# EAGLE board PCB Layout (EAGLE 9.7.0)
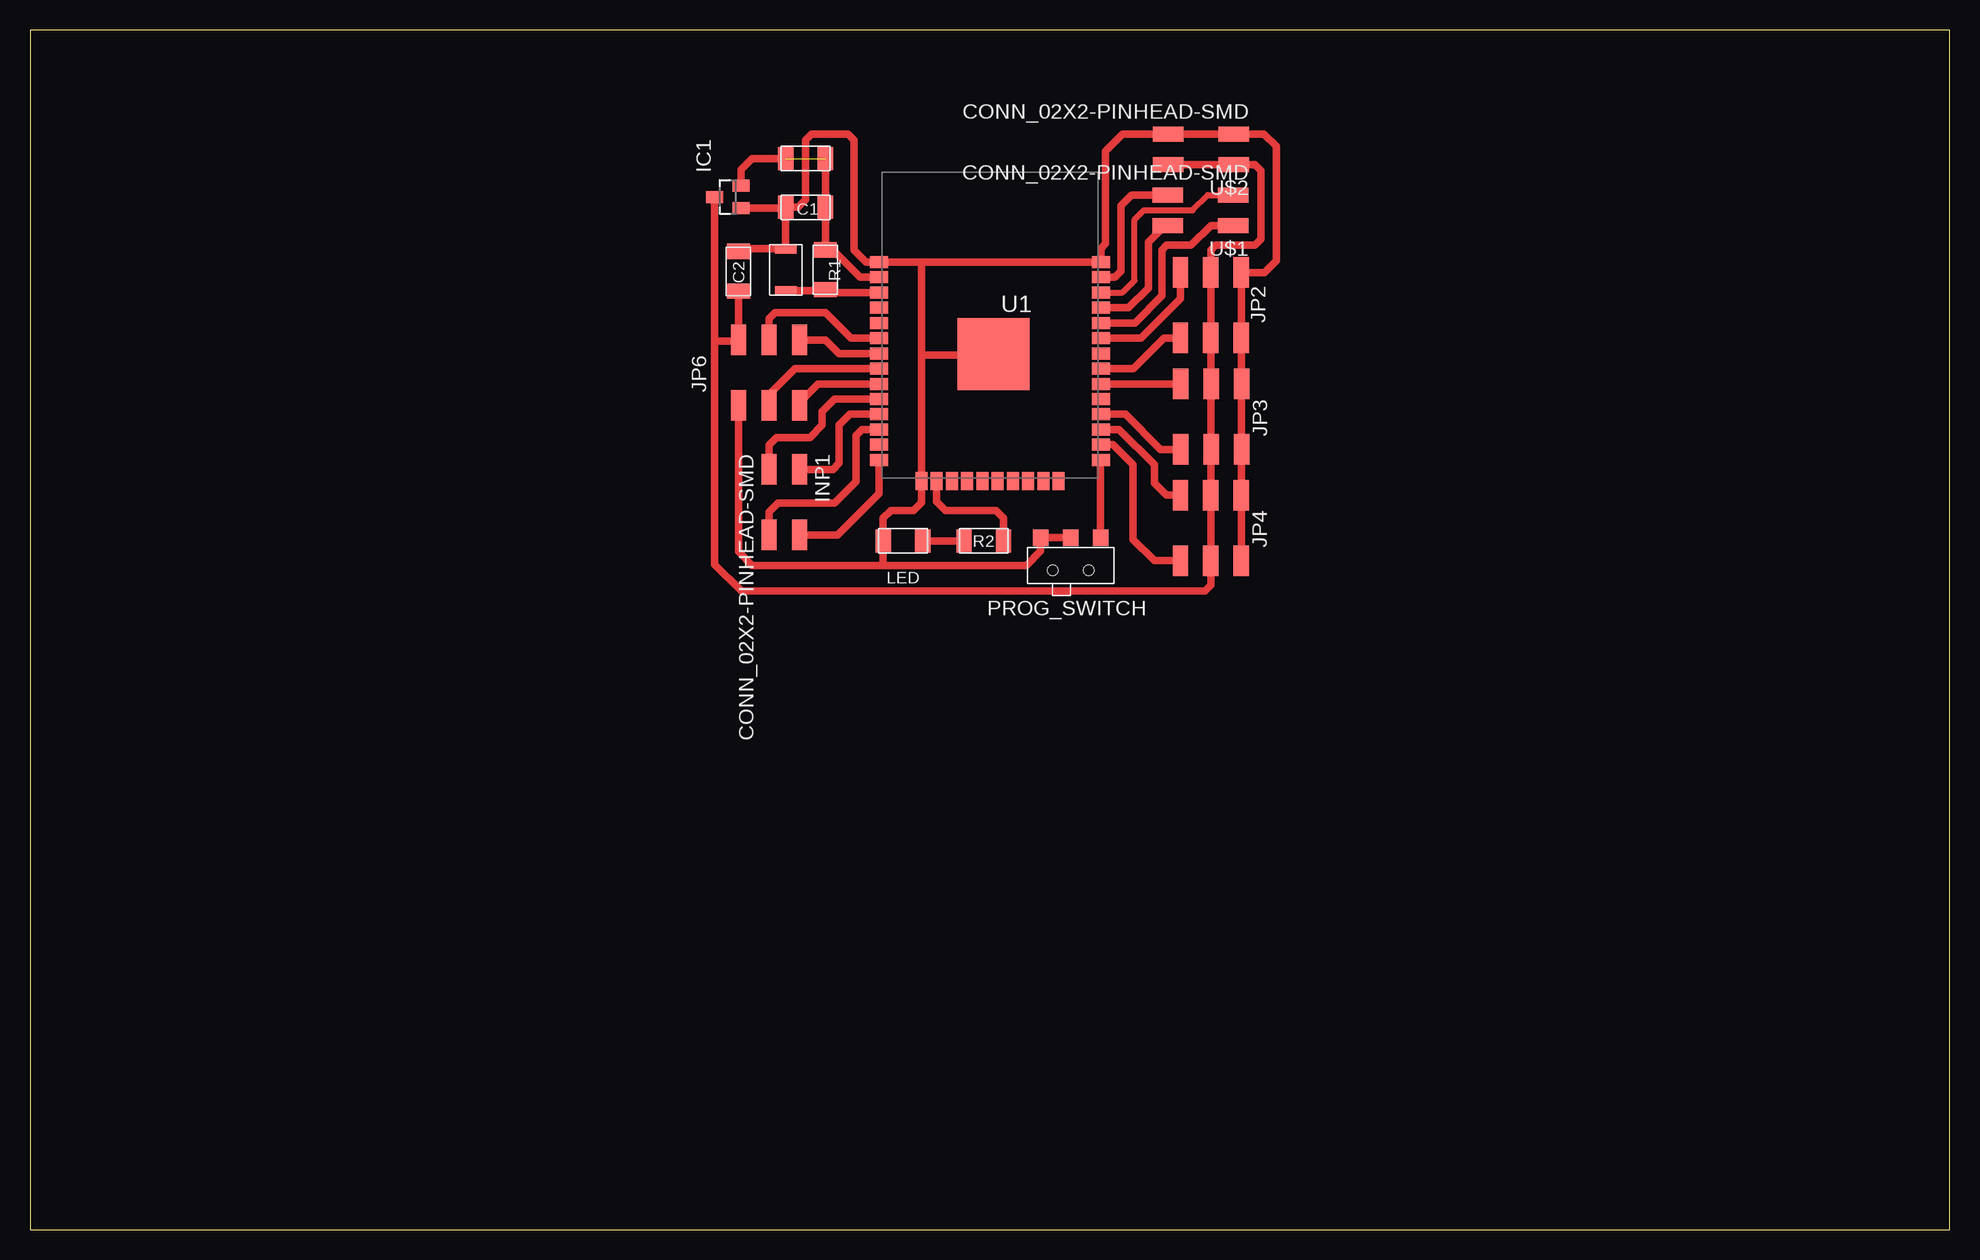
[diagram p0: board, top side]
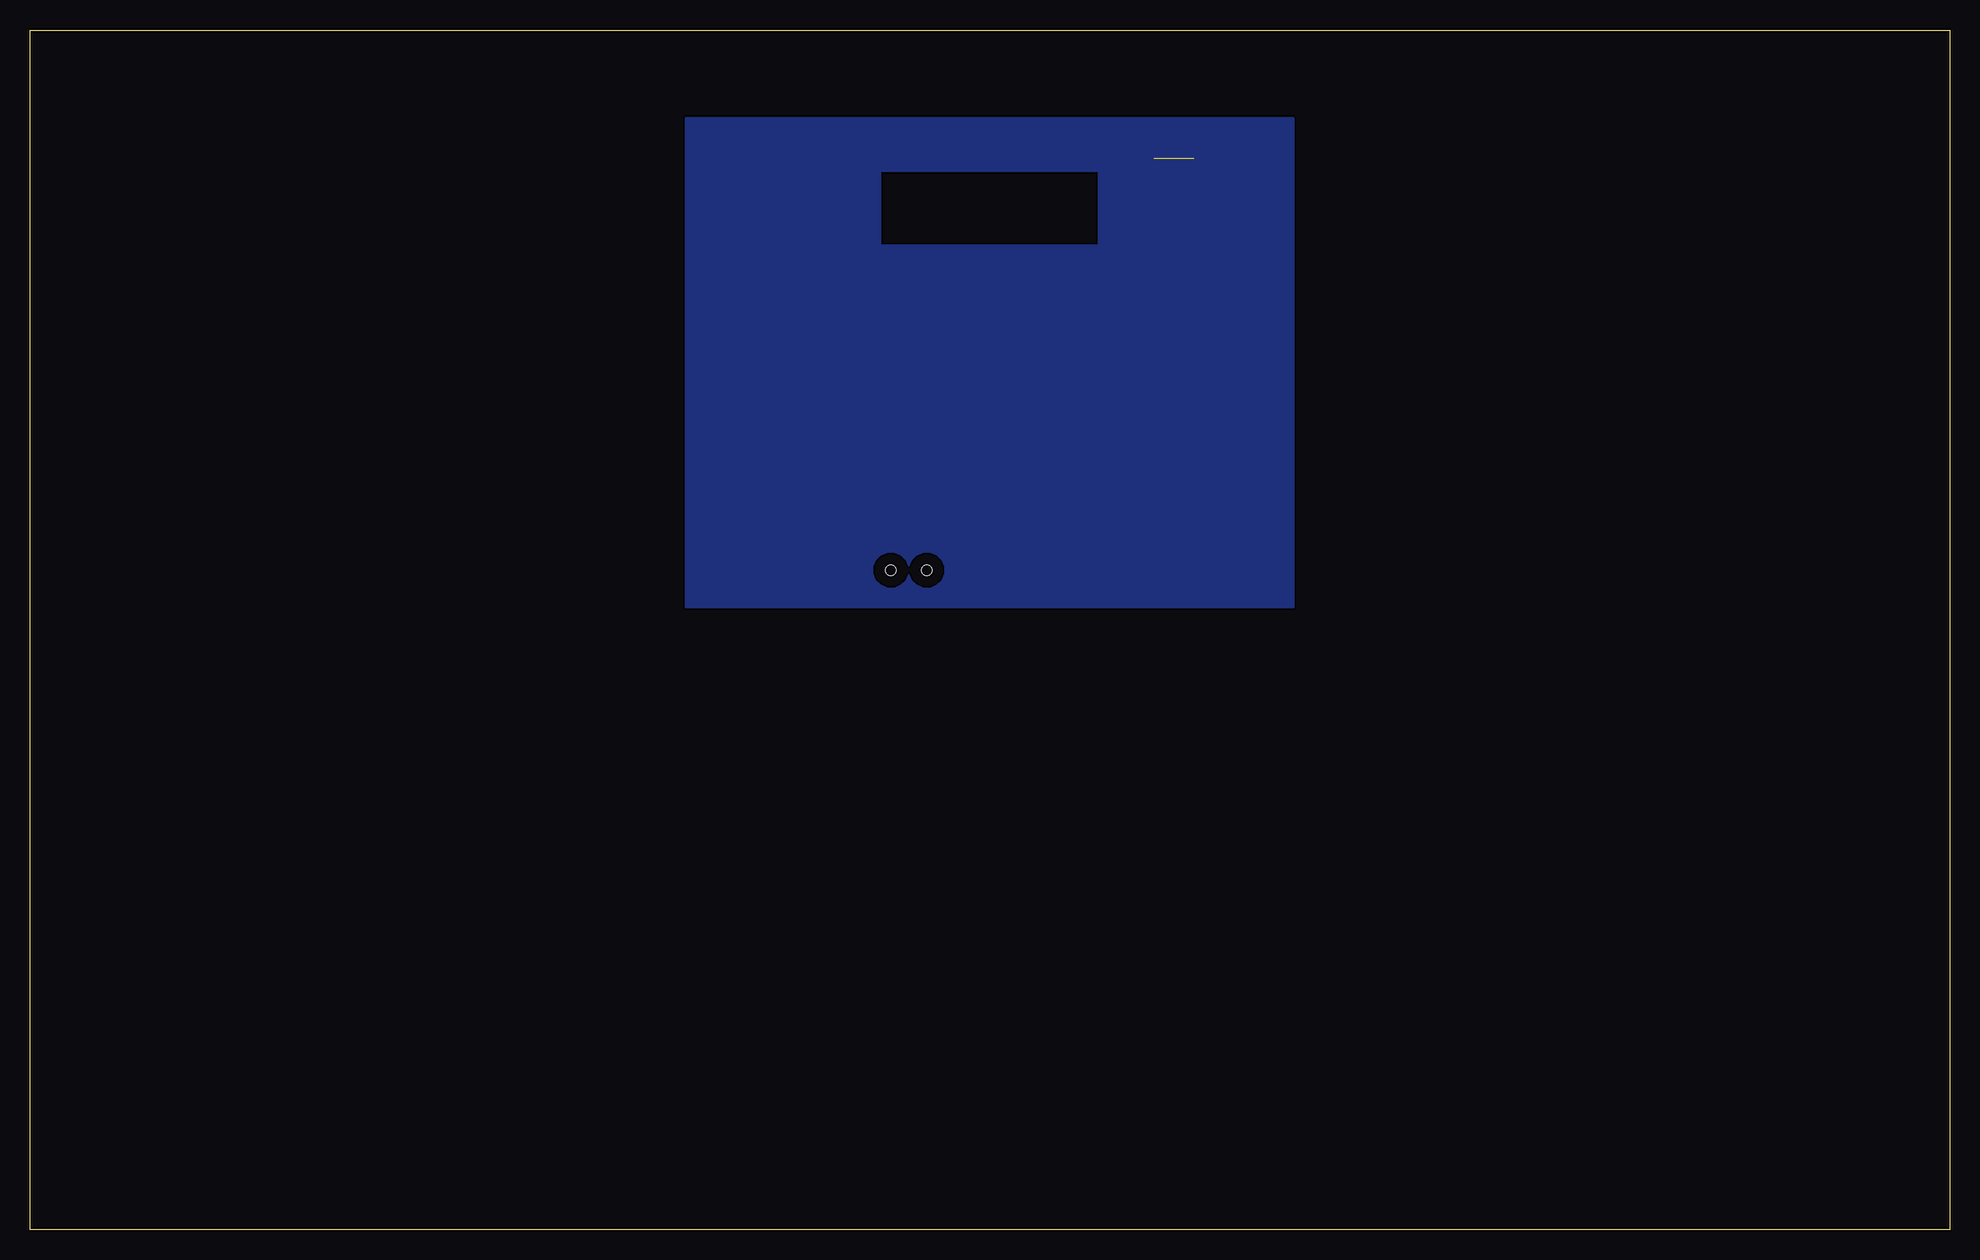
[diagram p1: board, bottom side, seen from below]

Size 160 x 100 mm. Coordinates in mm from the lower left corner, seen from the top.
Outline: 0,0 160,0 160,100 0,100 0,0
Copper layers (1*16): Top / Bottom
Stack-up Default Layer Stack: Top User Defined 0.035mm / Dielectric-1 User Defined 1.5mm / Bottom User Defined 0.035mm
Design rules "default": minimum track width 6mil, minimum drill 0.35mm, track to track 6mil, track to pad 6mil, pad to pad 6mil, via to via 6mil, smd to smd 6mil, copper to edge 40mil, drill to drill 6mil, minimum pad ring 10mil, minimum via ring 8mil, stop-mask expansion 4mil, vias tented up to drill 0mil, thermal gap 10mil

## Footprints (pad centres in the part's own frame; a part is rotated, then mirrored left to right if it is on the bottom)
C1206FAB = smd 1.27 x 1.905: 1 -1.651,0; 2 1.651,0
SOT23 = smd 1 x 1.4: 1 -0.95,-1.1; 2 0.95,-1.1; 3 0,1.1
2X02SMD = smd 2.54 x 1.27: 1 -2.54,1.27; 2 2.92,1.27; 3 -2.54,-1.27; 4 2.92,-1.27
2X03SMD = smd 2.54 x 1.27: 1 -2.54,2.54; 2 2.92,2.54; 3 -2.54,0; 4 2.92,0; 5 -2.54,-2.54; 6 2.92,-2.54
LED1206FAB = smd 1.27 x 1.905: 1 -1.651,0; 2 1.651,0
AYZ0102AGRLC = smd 1.27 x 1.397: 1 2.5,-2.3; 2 0,-2.3; 3 -2.5,-2.3 | hole 0.85: -1.5,0.4; 1.5,0.4
R1206FAB = smd 1.27 x 1.905: 1 -1.651,0; 2 1.651,0
B3U-1000P(M) = smd 0.8 x 1.8: 1 -1.75,0; 2 1.75,0
ESP-WROOM-32 = smd 1.5 x 1: 1 -9.25,7; 2 -9.25,5.73; 3 -9.25,4.46; 4 -9.25,3.19; 5 -9.25,1.92; 6 -9.25,0.65; 7 -9.25,-0.62; 8 -9.25,-1.89; 9 -9.25,-3.16; 10 -9.25,-4.43; 11 -9.25,-5.7; 12 -9.25,-6.97; 13 -9.25,-8.24; 14 -9.25,-9.51; 25 9.25,-9.51; 26 9.25,-8.24; 27 9.25,-6.97; 28 9.25,-5.7; 29 9.25,-4.43; 30 9.25,-3.16; 31 9.25,-1.89; 32 9.25,-0.62; 33 9.25,0.65; 34 9.25,1.92; 35 9.25,3.19; 36 9.25,4.46; 37 9.25,5.73; 38 9.25,7 | smd 1 x 1.5: 15 -5.7,-11.25; 16 -4.43,-11.25; 17 -3.16,-11.25; 18 -1.89,-11.25; 19 -0.62,-11.25; 20 0.65,-11.25; 21 1.92,-11.25; 22 3.19,-11.25; 23 4.46,-11.25; 24 5.73,-11.25 | smd 6 x 6: GND 0.3,-0.7

## Placement (x,y rotation side)
C1  1uF  [C1206FAB]  64.64,85.22 0 top
C2  10uF  [C1206FAB]  59.05,79.88 90 top
IC1  3.3V  [SOT23]  58.17,86.08 90 top
INP1  CONN_02X2-PINHEAD-SMD  [2X02SMD]  62.87,60.83 270 top
JP2  [2X03SMD]  98.42,76.86 90 top
JP3  [2X03SMD]  98.45,67.56 90 top
JP4  [2X03SMD]  98.42,58.29 90 top
JP6  [2X03SMD]  61.59,71.61 270 top
LED  LEDFAB1206  [LED1206FAB]  72.77,57.4 180 top
PROG_SWITCH  SW_SLIDE-SWITCH  [AYZ0102AGRLC]  86.74,55.37 180 top
R1  10K  [R1206FAB]  66.29,80.01 270 top
R2  200  [R1206FAB]  79.5,57.4 180 top
R3  0  [R1206FAB]  64.64,89.28 180 top
S1  RESET  [B3U-1000P(M)]  62.99,80.01 90 top
U1  ESP-WROOM-32  [ESP-WROOM-32]  80.01,73.66 0 top
U$1  CONN_02X2-PINHEAD-SMD  [2X02SMD]  97.76,84.96 180 top
U$2  CONN_02X2-PINHEAD-SMD  [2X02SMD]  97.79,90.04 180 top

## Library data of the parts
C1 C2 IC1 INP1 JP2-JP4 JP6 LED PROG_SWITCH R1-R3 U$1 U$2 = fab
S1 = Switch; CATEGORY: SWITCH; DESCRIPTION: Ultra-small Surface-mounting Tactile Switches with High Contact Reliability; MANUFACTURER: OMRON; OPERATING_TEMPERATURE: -25°C to +70°C at 60%RH max; PART_STATUS: ACTIVE; ROHS_COMPLIANCE: RoHS Compliant; SERIES: B3U; TYPE: Tactile
U1 = esp32

## Nets
EN: R1.2 S1.1 U1.3
GND: C1.1 C2.2 IC1.1 JP2.5 JP2.6 JP3.5 JP3.6 JP4.5 JP4.6 JP6.6 LED.2 PROG_SWITCH.1 PROG_SWITCH.2 S1.2 U1.1 U1.15 U1.38 U1.GND U$2.3 U$2.4
IO00: PROG_SWITCH.3 U1.25
IO04: JP4.1 U1.26
IO12: INP1.2 U1.14
IO16: JP4.2 U1.27
IO17: JP3.1 U1.28
IO18: JP3.2 U1.30
IO19: JP2.1 U1.31
IO21: JP2.2 U1.33
IO22: U1.36 U$1.3
IO23: U1.37 U$1.4
IO25: INP1.3 U1.10
IO26: INP1.1 U1.11
IO27: INP1.4 U1.12
IO32: JP6.4 U1.8
IO33: JP6.2 U1.9
IO34: JP6.3 U1.6
IO35: JP6.1 U1.7
LED: R2.1 U1.16
N$1: LED.1 R2.2
RX: U1.34 U$1.1
TX: U1.35 U$1.2
VCC: C2.1 IC1.3 JP2.3 JP2.4 JP3.3 JP3.4 JP4.3 JP4.4 JP6.5 U$2.1 U$2.2
VDD: C1.2 IC1.2 R1.1 R3.1 R3.2 U1.2

## Tracks (layer width: path | path; a pad name or v marks a point on that pad's centre or on a via)
EN
  Top 0.61: 63.09,78.36 S1.1 66.19,78.26 R1.2 66.53,78.12 U1.3
GND
  Top 0.61: JP4.5 JP4.6 100.97,65 JP3.5 JP3.6 100.97,70.51 JP2.5 JP2.6 102.89,79.78 103.89,80.77 103.89,90.3 102.87,91.31 U$2.3 U$2.4 91.06,91.31 89.66,89.92 89.66,82.17 89.26,81.77 U1.38 74.3,80.66 | 74.3,80.66 U1.1 69.71,80.66 68.71,81.66 68.71,90.81 68.2,91.31 65.15,91.31 64.64,90.81 64.64,85.85 64.01,85.22 C1.1 | 74.31,72.9 U1.15 74.31,60.59 73.66,59.94 71.75,59.94 71.12,59.31 LED.2 71.12,55.37 | 74.31,72.9 74.31,80.64 74.3,80.66 | U1.GND 80.25,72.9 74.31,72.9 | PROG_SWITCH.2 PROG_SWITCH.1 84.24,56.55 83.06,55.37 71.12,55.37 | 71.12,55.37 60.2,55.37 59.05,56.52 JP6.6 | C2.2 59.28,81.76 S1.2 C1.1 | C1.1 62.9,85.13 IC1.1
IO00
  Top 0.61: PROG_SWITCH.3 89.24,64.13 U1.25
IO04
  Top 0.61: U1.26 90.28,65.42 91.95,63.75 91.95,57.53 93.73,55.75 JP4.1
IO12
  Top 0.61: INP1.2 67.31,57.91 70.76,61.36 U1.14
IO16
  Top 0.61: U1.27 90.79,66.69 93.73,63.75 93.73,62.23 94.74,61.21 JP4.2
IO17
  Top 0.61: U1.28 91.3,67.96 94.23,65.02 JP3.1
IO18
  Top 0.61: U1.30 89.28,70.48 JP3.2
IO19
  Top 0.61: U1.31 91.96,71.77 94.51,74.32 JP2.1
IO21
  Top 0.61: U1.33 92.6,74.31 95.89,77.6 JP2.2
IO22
  Top 0.508: U1.36 91.07,78.12 92.08,79.12 92.08,84.2 92.84,84.96 96.9,84.96 98.17,86.23 U$1.3
IO23
  Top 0.61: U1.37 90.44,79.39 90.93,79.88 90.93,85.34 91.82,86.23 U$1.4
IO25
  Top 0.61: INP1.3 61.59,65.41 62.23,66.04 65.02,66.04 66.04,67.06 66.04,68.2 67.07,69.23 U1.10
IO26
  Top 0.61: INP1.1 66.93,63.37 67.44,63.88 67.44,67.06 68.34,67.96 U1.11
IO27
  Top 0.61: INP1.4 61.59,59.82 62.36,60.58 67.06,60.58 68.83,62.36 68.83,66.17 69.36,66.69 U1.12
IO32
  Top 0.61: JP6.4 61.59,69.6 63.77,71.77 U1.8
IO33
  Top 0.61: JP6.2 64.14,68.95 65.69,70.5 U1.9
IO34
  Top 0.61: JP6.3 61.59,75.95 62.1,76.45 66.29,76.45 68.45,74.3 70.75,74.3 U1.6
IO35
  Top 0.61: JP6.1 66.31,74.15 67.44,73.03 70.75,73.03 U1.7
LED
  Top 0.61: U1.16 75.58,60.69 76.33,59.94 80.52,59.94 81.15,59.31 R2.1
N$1
  Top 0.61: R2.2 LED.1
OUTLINE
  pour Bottom: 54.61,92.71 105.41,92.71 105.41,51.82 54.61,51.82
RX
  Top 0.61: U$1.1 98.42,83.69 96.77,82.04 94.74,82.04 94.36,81.66 94.36,77.85 92.09,75.58 U1.34
TX
  Top 0.61: U$1.2 94.61,83.69 93.22,82.3 93.22,78.49 91.58,76.85 U1.35
VCC
  Top 0.61: U$2.2 U$2.1 102.11,88.77 102.62,88.27 102.62,82.55 102.11,82.04 98.81,82.04 98.42,81.66 JP2.4 JP2.3 98.42,70.51 JP3.4 JP3.3 98.45,61.24 JP4.4 JP4.3 98.42,53.72 97.93,53.23 59.3,53.23 57.07,55.46 57.07,74.04 | 57.04,86.11 IC1.3 57.07,74.04 | C2.1 JP6.5 58.98,74.08 57.11,74.08 57.07,74.04
VDD  (1 unrouted)
  Top 0.61: U1.2 69.2,79.39 66.93,81.66 R1.1 C1.2 R3.1 | R3.2 60.2,89.28 59.27,88.35 IC1.2